# Altium PCB Test_Jig_Project1.PcbDoc
Units mil, origin at the board's own origin, x right, y up, seen from the top; angles counter-clockwise.
Board outline 3937 x 3737 mil, 2 copper layers (Top Layer, Bottom Layer); 46 components, 70 nets, 266 pads, 34 vias.
Unrouted connection lines stored in the file: 33.
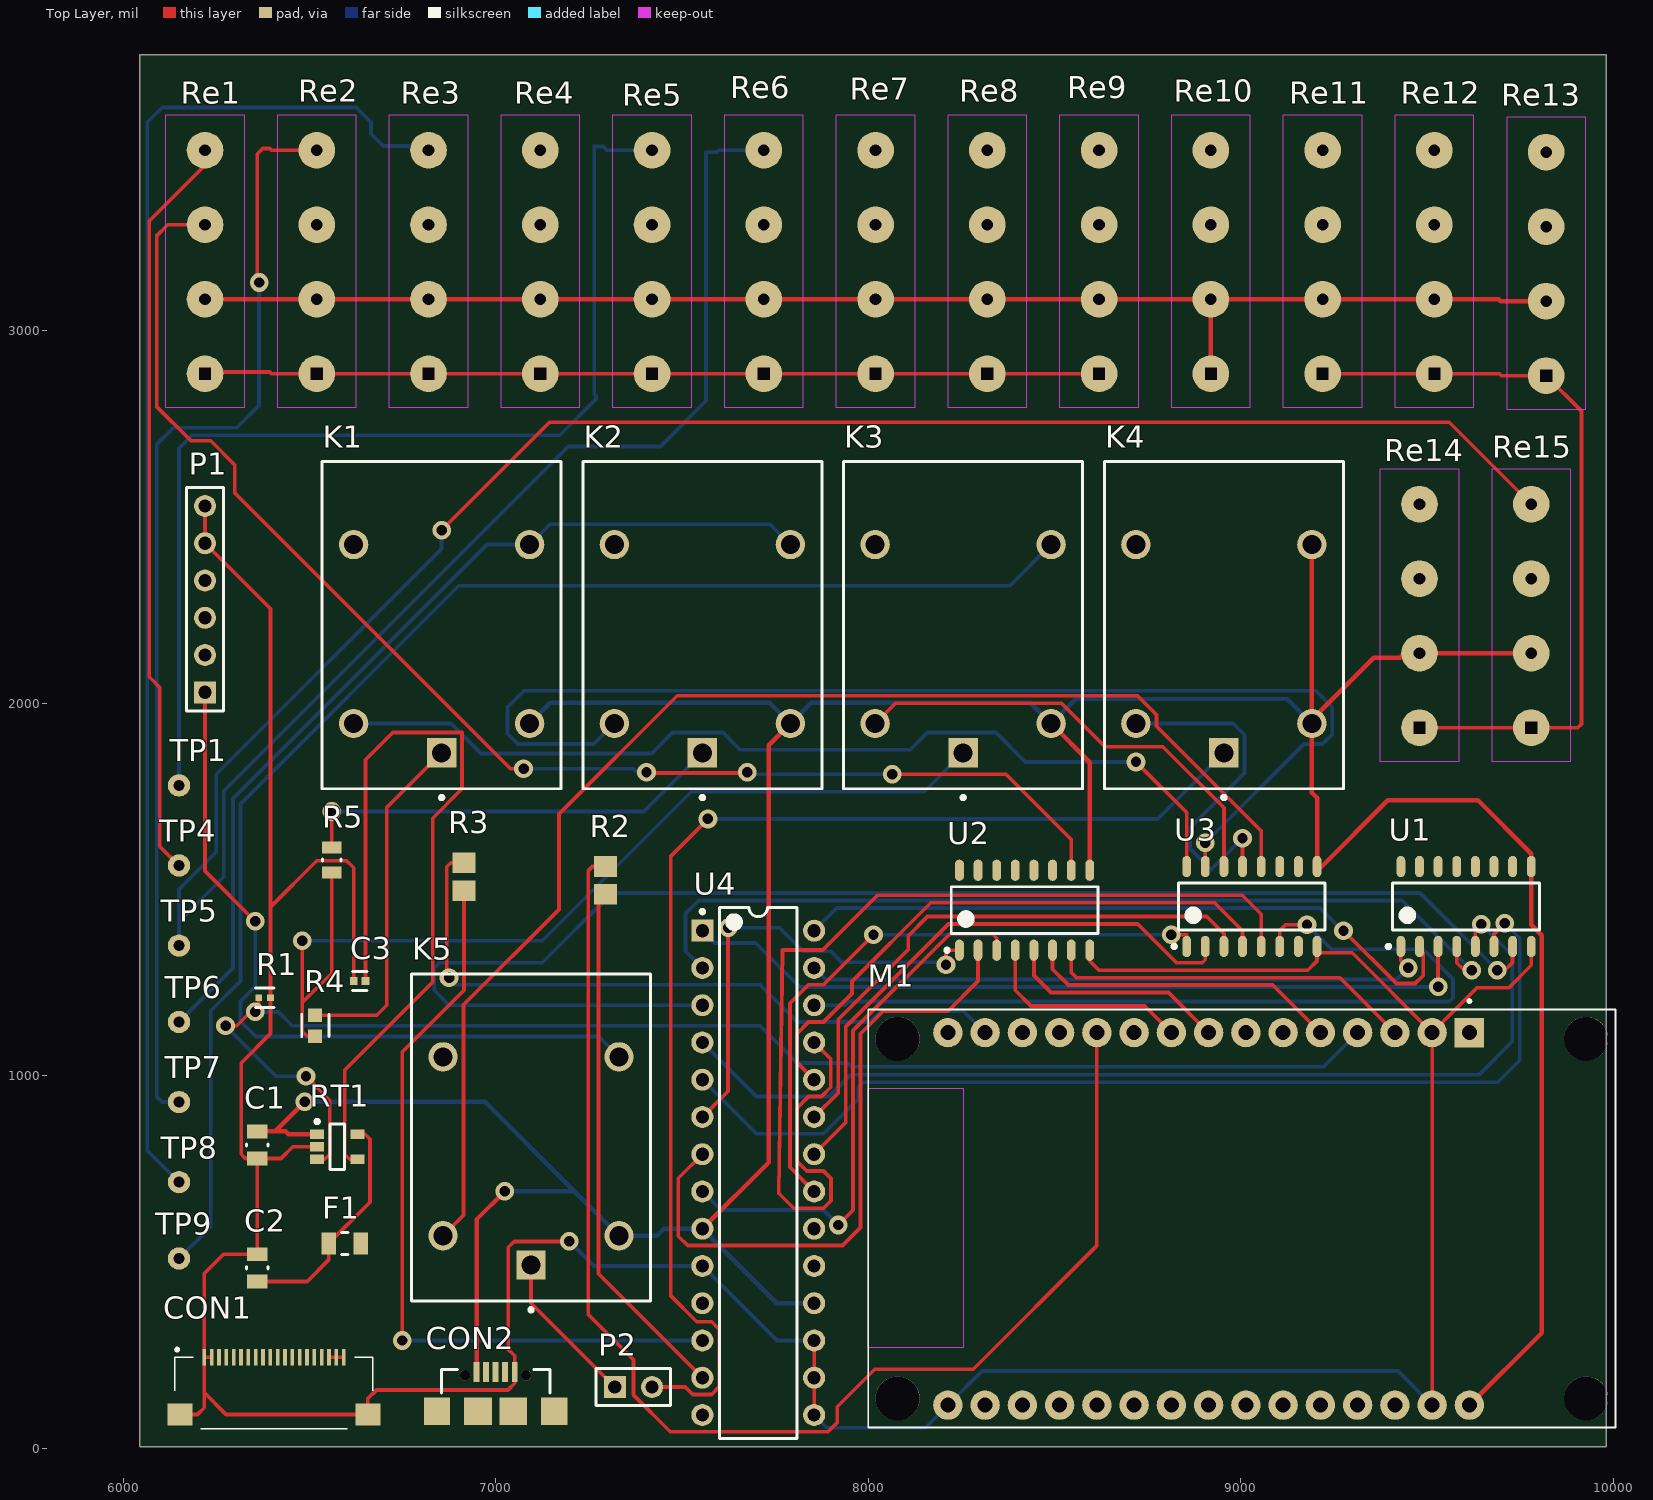
[diagram p0: Top Layer view]
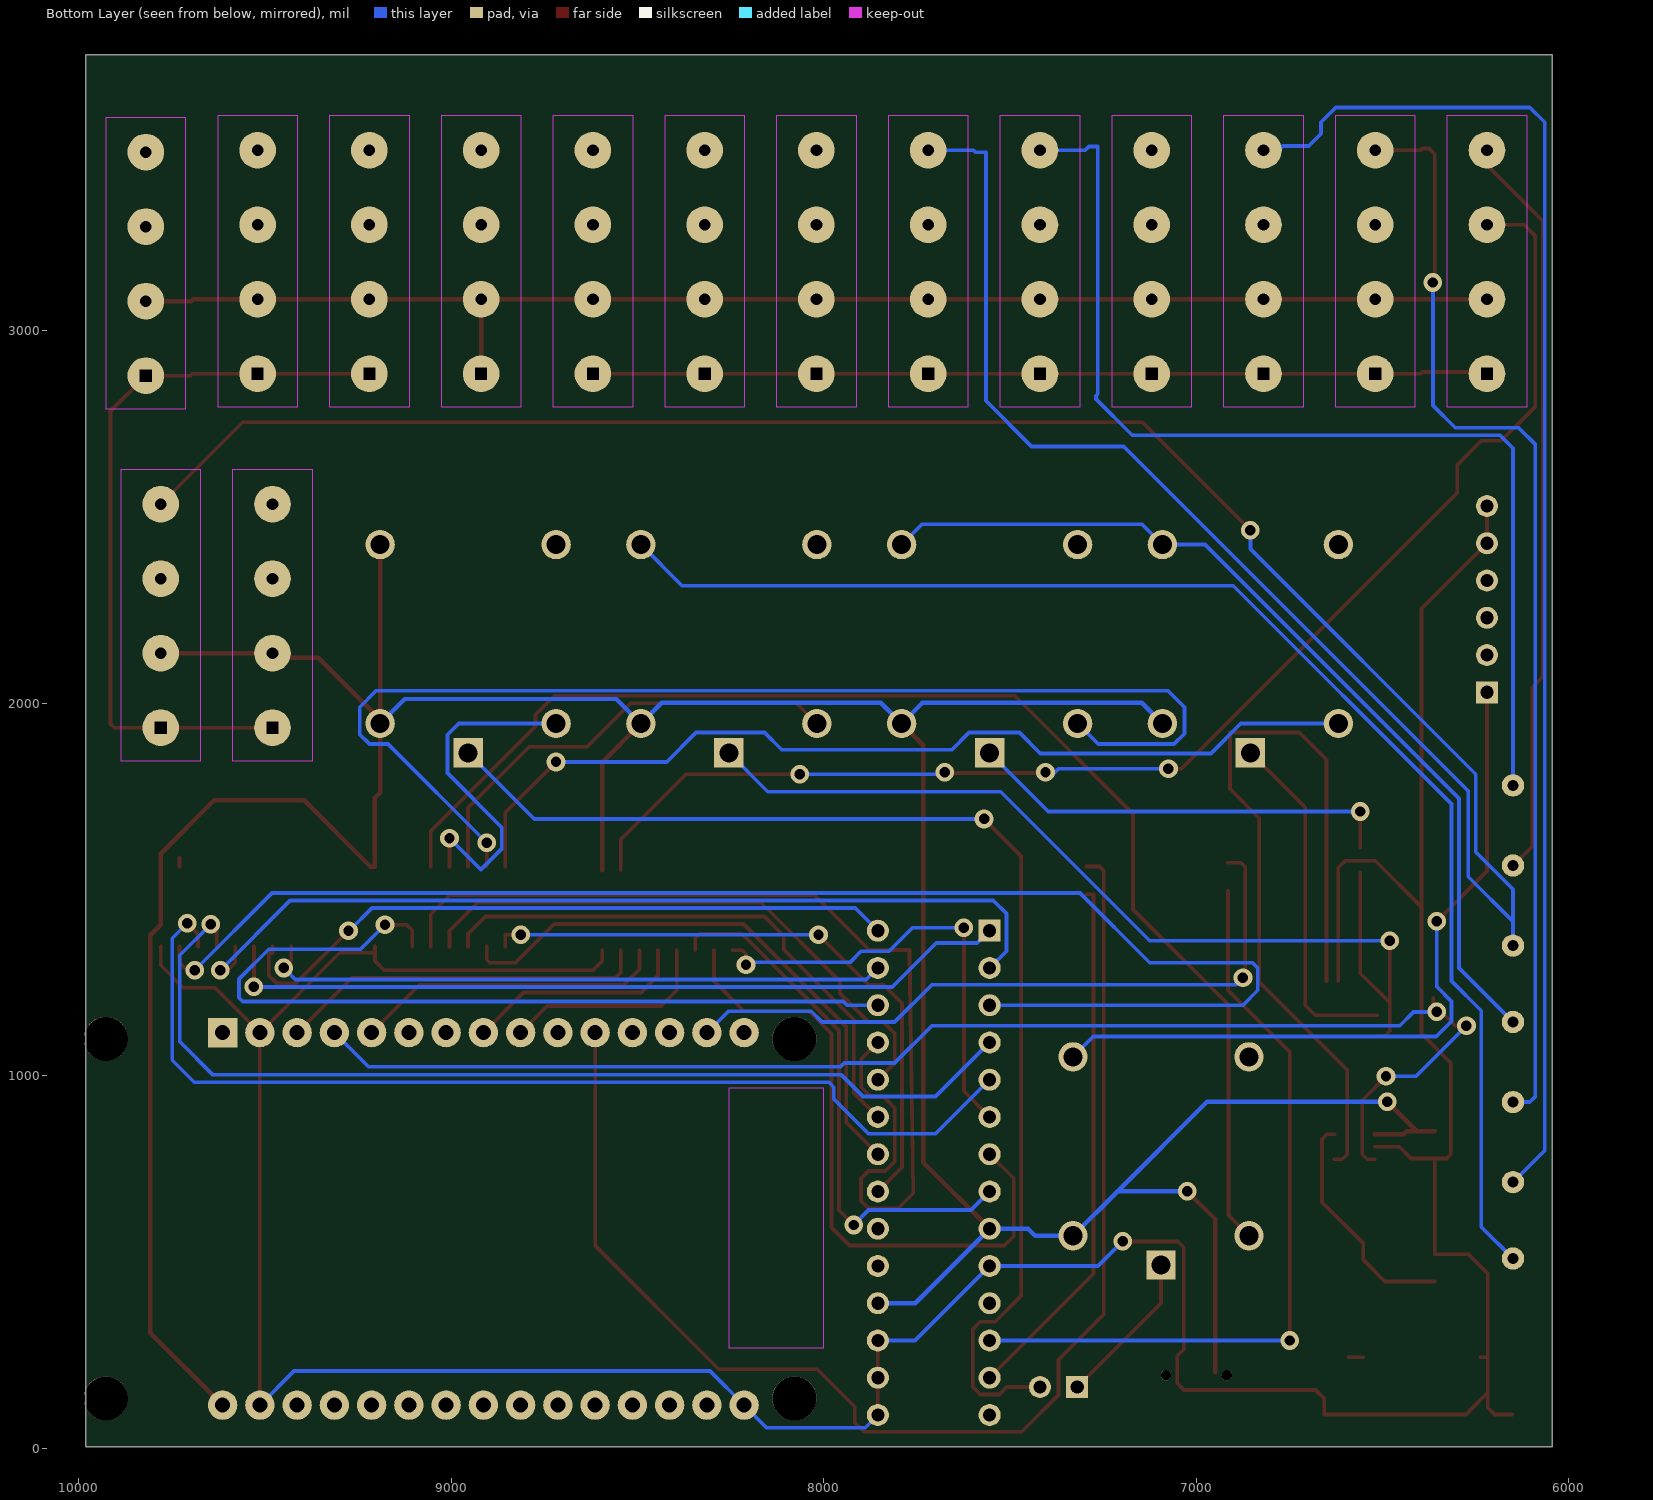
[diagram p1: Bottom Layer view, seen from below]

## Layer stack, top to bottom
Top Solder: solder mask 0.4, Solder Resist, Dk 3.5
Top Layer: signal copper 1.4
Dielectric 1: dielectric 12.6, FR-4, Dk 4.8
Bottom Layer: signal copper 1.4
Bottom Solder: solder mask 0.4, Solder Resist, Dk 3.5

## Board outline
6045,5 9982,5 9982,3742 6045,3742

## Design rules (kind name [scope] priority, off if disabled: settings)
Clearance [All] p1: gap=10 ignorepadtopadclearanceinfootprint=FALSE except(0: Arc-Hole Track-Hole SMDPad-Hole THPad-Hole Via-Hole Fill-Hole Poly-Hole Region-Hole Text-Hole)
PolygonConnect [All] p1: connectstyle=Relief reliefconductorwidth=10 reliefentries=4 polygonreliefangle="90 Angle" airgapwidth=10
RoutingVias [All] p1: holewidth=28 width=50 viastyle="Through Hole" minholewidth=28 minwidth=50 maxholewidth=28 maxwidth=50
SolderMaskExpansion [All] p1: expansion=4
Width "Schematic Width Constraint_1" [InNet('USB_5V_IN')] p1: maxlimit=12 minlimit=6 preferedwidth=12 minimp=50.000000 maximp=50.000000 favimp=50.000000
Width [All] p2: maxlimit=10 minlimit=10 preferedwidth=10
30 further rules are at their usual default settings.

## Components (designator, comment, footprint, x,y, rotation, side; value= is the part's Value field where it differs from the comment)
C1 "1uF" FP-CC0805-0_85-MFG 6360,815 r270 top value="1 uF"
C2 "1uF" FP-CC0805-0_85-MFG 6360,485 r90 top value="1 uF"
C3 "22pF" FP-C0402-BB-MFG 6635,1255 r180 top value="22 pF"
CON1 "XF2M-2015-1A" XF2M20151A 6405,175 r0 top
CON2 "629105136821" 629105136821 7000,100 r0 top
F1 "100mA" FP-MF-PSMF-MFG 6595,550 r0 top value=1-7.5O
K1 "JS1-5V-F" FP-JS1-5V-F-MFG 6855,2210 r90 top
K2 "JS1-5V-F" FP-JS1-5V-F-MFG 7555,2210 r90 top
K3 "JS1-5V-F" FP-JS1-5V-F-MFG 8255,2210 r90 top
K4 "JS1-5V-F" FP-JS1-5V-F-MFG 8955,2210 r90 top
K5 "JS1-5V-F" FP-JS1-5V-F-MFG 7095,835 r90 top
M1 "ESP32-WROOM-32" ESP32-DEVKIT-V1 9010,640 r270 top
P1 "Header 6" HDR1X6 6220,2030 r90 top
P2 "Header 2" HDR1X2 7320,165 r0 top
R1 "100kΩ" FP-CRCW0402-e3-IPC_C 6380,1210 r0 top
R2 "100Ω" RESC2013X60X40ML20T25 7295,1525 r90 top
R3 "100Ω" RESC2013X60X40ML20T25 6915,1535 r270 top
R4 "14Ω" FP-CRCW0603-e3-IPC_B 6515,1135 r90 top
R5 "12Ω" FP-CRCW0805-e3-IPC_C 6560,1580 r90 top
Re1 "PAN CHANG SIP-1A05" "PAN CHANG SIP-1A05" 6220,2885 r90 top
Re2 "PAN CHANG SIP-1A05" "PAN CHANG SIP-1A05" 6520,2885 r90 top
Re3 "PAN CHANG SIP-1A05" "PAN CHANG SIP-1A05" 6820,2885 r90 top
Re4 "PAN CHANG SIP-1A05" "PAN CHANG SIP-1A05" 7120,2885 r90 top
Re5 "PAN CHANG SIP-1A05" "PAN CHANG SIP-1A05" 7420,2885 r90 top
Re6 "PAN CHANG SIP-1A05" "PAN CHANG SIP-1A05" 7720,2885 r90 top
Re7 "PAN CHANG SIP-1A05" "PAN CHANG SIP-1A05" 8020,2885 r90 top
Re8 "PAN CHANG SIP-1A05" "PAN CHANG SIP-1A05" 8320,2885 r90 top
Re9 "PAN CHANG SIP-1A05" "PAN CHANG SIP-1A05" 8620,2885 r90 top
Re10 "PAN CHANG SIP-1A05" "PAN CHANG SIP-1A05" 8920,2885 r90 top
Re11 "PAN CHANG SIP-1A05" "PAN CHANG SIP-1A05" 9220,2885 r90 top
Re12 "PAN CHANG SIP-1A05" "PAN CHANG SIP-1A05" 9520,2885 r90 top
Re13 "PAN CHANG SIP-1A05" "PAN CHANG SIP-1A05" 9820,2880 r90 top
Re14 "PAN CHANG SIP-1A05" "PAN CHANG SIP-1A05" 9480,1935 r90 top
Re15 "PAN CHANG SIP-1A05" "PAN CHANG SIP-1A05" 9780,1935 r90 top
RT1 "RT9193" SOT85P279X130-5N 6440,715 r0 top
TP1 "TP" Testpoint#1 6145,1780 r0 top net-tie
TP4 "TP" Testpoint#2 6120,1560 r90 top net-tie
TP5 "TP" Testpoint#3 6125,1345 r90 top net-tie
TP6 "TP" Testpoint#4 6135,1140 r90 top net-tie
TP7 "TP" Testpoint#4 6135,925 r90 top net-tie
TP8 "TP" Testpoint#3 6125,710 r90 top net-tie
TP9 "TP" Testpoint#5 6110,505 r90 top net-tie
U1 "ULN2003" SOP127P600X175-16N 9605,1455 r90 top
U2 "ULN2003" SOP127P600X175-16N 8420,1445 r90 top
U3 "ULN2003" SOP127P600X175-16N 9030,1455 r90 top
U4 "MCP23017-E/SP" SPDIP300-SP28 7705,740 r0 top

## Footprints (in the part's own frame and the unit in brackets; to place one, negate y for a bottom-side part, rotate by r counter-clockwise, add the part's x,y. Pads: shape width x height; smd on the part's side, far side on the other; paste and mask are expansions set on the pad)
629105136821 [mm] "Micro USB 2.0 SMT Type B Horizontal 5 Contacts"
  rect 0.4x1.35 smd: 1(-1.3,2.675) 2(-0.65,2.675) 3(0,2.675) 4(0.65,2.675) 5(1.3,2.675)
  round 0.7 hole 0.7 unplated: MH1(-2.075,2.45) MH2(2.075,2.45)
  rect 1.8x1.9 smd: Shell(-4,0) Shell(4,0)
  rect 1.9x1.9 smd: Shell(-1.2,0) Shell(1.2,0)
  silkscreen extent -3.7,1.25 3.7,2.85, body extent -4,-2.73 4,3.17, height 2.69
ESP32-DEVKIT-V1 [mm]
  rect 2x2 hole 1.02: 1(-12.098,15.341)
  round 2 hole 1.02: 2(-12.098,12.801) 3(-12.098,10.261) 4(-12.098,7.721) 5(-12.098,5.181) 6(-12.098,2.641) 7(-12.098,0.101) 8(-12.098,-2.439) 9(-12.098,-4.979) 10(-12.098,-7.519) 11(-12.098,-10.059) 12(-12.098,-12.599) 13(-12.098,-15.139) 14(-12.098,-17.679) 15(-12.098,-20.219) 16(13.302,-20.219) 17(13.302,-17.679) 18(13.302,-15.139) 19(13.302,-12.599) 20(13.302,-10.059) 21(13.302,-7.519) 22(13.302,-4.979) 23(13.302,-2.439) 24(13.302,0.101) 25(13.302,2.641) 26(13.302,5.181) 27(13.302,7.721) 28(13.302,10.261) 29(13.302,12.801) 30(13.302,15.341)
  round 3 hole 3 unplated: ""(-11.678,23.301) ""(-11.678,-23.649) ""(12.832,23.301) ""(12.832,-23.649)
  Keep-Out Layer region: 9.382,-25.649 -8.308,-25.649 -8.308,-19.159 9.382,-19.159
  Keep-Out Layer region: 9.382,-25.649 -8.308,-25.649 -8.308,-19.159 9.382,-19.159
  Keep-Out Layer region: 9.382,-25.649 -8.308,-25.649 -8.308,-19.159 9.382,-19.159
  silkscreen extent -14.35,-25.65 14.83,25.3, body extent -13.5,-25.63 15,25.3, height 7.2
FP-C0402-BB-MFG [mm]
  rect 0.52x0.52 smd paste+0 mask+0: 1(-0.4,0) 2(0.4,0)
  silkscreen extent -0.5,-0.64 0.5,0.64, body extent -0.8,-0.4 0.8,0.4, height 0.25
FP-CC0805-0_85-MFG [mm]
  rect 0.95x1.4 smd paste+0 mask+0: 1(-0.925,0) 2(0.925,0)
  silkscreen extent -0.07,-0.73 0.07,0.73, body extent -1.6,-1.05 1.6,1.05, height 0.25
FP-CRCW0402-e3-IPC_C [mil]
  rect 18.43x18.6 smd paste+0 mask+0: 1(-15.83,0) 2(15.83,0)
  silkscreen extent -25,-27 25,27, body extent -29,-15 29,15, height 10
FP-CRCW0603-e3-IPC_B [mil]
  rect 36.81x37.88 smd paste+0 mask+0: 1(-28.17,0) 2(28.17,0)
  silkscreen extent -30,-37 30,35, body extent -56,-29 56,29, height 10
FP-CRCW0805-e3-IPC_C [mil]
  rect 31.75x51.5 smd paste+0 mask+0: 1(-33.5,0) 2(33.5,0)
  silkscreen extent -3,-25 3,25, body extent -53,-31 53,31, height 10
FP-JS1-5V-F-MFG [mm]
  rect 2x2 hole 1.3 paste-1000 mask+0: 1(-8.7,0)
  round 2 hole 1.3 paste-1000 mask+0: 2(-6.7,-6) 3(5.5,-6) 4(5.5,6) 5(-6.7,6)
  silkscreen extent -11.87,-8.15 11.15,8.15, body extent -11.25,-8.25 11.25,8.25, height 0.25
FP-MF-PSMF-MFG [mm]
  rect 1x1.5 smd paste+0 mask+0: 1(-1.1,0) 2(1.1,0)
  silkscreen extent -0.22,-0.75 0.22,0.75, body extent -1.7,-0.85 1.7,0.85, height 0.25
HDR1X2 [mm] "Connector; Header; 2 Position"
  rect 1.5x1.5 hole 0.9: 1(0,0)
  round 1.5 hole 0.9: 2(2.54,0)
  silkscreen extent -1.27,-1.27 3.81,1.27
HDR1X6 [mm] "Connector; Header; 6 Position"
  rect 1.5x1.5 hole 0.9: 1(0,0)
  round 1.5 hole 0.9: 2(2.54,0) 3(5.08,0) 4(7.62,0) 5(10.16,0) 6(12.7,0)
  silkscreen extent -1.27,-1.27 13.97,1.27
"PAN CHANG SIP-1A05" [mm]
  round 2.5 hole 0.8 square: 1(0,0)
  round 2.5 hole 0.8: 2(5.08,0) 3(10.16,0) 4(15.24,0)
  Top Layer pour cut-out: 6.477,8.763
  Keep-Out Layer region: -2.286,-2.698 17.614,-2.698 17.614,2.702 -2.286,2.702
  body extent -2.33,-2.7 17.57,2.7, height 7.95
RESC2013X60X40ML20T25 [mm] "Chip Resistor, 2-Leads, Body 2.00x1.25mm, IPC Low Density"
  rect 1.4x1.55 smd: 1(-0.95,0) 2(0.95,0)
  body extent -1.1,-0.72 1.1,0.72, height 0.6
SOP127P600X175-16N [mm] "SOP, 16-Leads, Body 9.90x3.90mm, Pitch 1.27mm, IPC Medium Density"
  oval 1.45x0.6 smd: 1(-2.725,4.445) 2(-2.725,3.175) 3(-2.725,1.905) 4(-2.725,0.635) 5(-2.725,-0.635) 6(-2.725,-1.905) 7(-2.725,-3.175) 8(-2.725,-4.445) 9(2.725,-4.445) 10(2.725,-3.175) 11(2.725,-1.905) 12(2.725,-0.635) 13(2.725,0.635) 14(2.725,1.905) 15(2.725,3.175) 16(2.725,4.445)
  silkscreen extent -2.85,-5 1.6,5.42, body extent -3,-5 3,5, height 1.75
SOT85P279X130-5N [mm] "SOT23, 5-Leads, Body 2.90x2.79mm, Pitch 0.85mm, IPC Medium Density"
  rect 0.95x0.65 smd: 1(2.054,3.263) 2(2.054,2.413) 3(2.054,1.563) 4(4.804,1.563) 5(4.804,3.263)
  silkscreen extent 1.93,0.86 3.93,4.26, body extent 1.93,0.86 4.93,3.96, height 1.3
SPDIP300-SP28 [mm] "DIP, 28-Pin, Row Spacing 7.62 mm, Pitch 2.54 mm"
  rect 1.5x1.5 hole 0.9: 1(-3.81,16.51)
  round 1.5 hole 0.9: 2(-3.81,13.97) 3(-3.81,11.43) 4(-3.81,8.89) 5(-3.81,6.35) 6(-3.81,3.81) 7(-3.81,1.27) 8(-3.81,-1.27) 9(-3.81,-3.81) 10(-3.81,-6.35) 11(-3.81,-8.89) 12(-3.81,-11.43) 13(-3.81,-13.97) 14(-3.81,-16.51) 15(3.81,-16.51) 16(3.81,-13.97) 17(3.81,-11.43) 18(3.81,-8.89) 19(3.81,-6.35) 20(3.81,-3.81) 21(3.81,-1.27) 22(3.81,1.27) 23(3.81,3.81) 24(3.81,6.35) 25(3.81,8.89) 26(3.81,11.43) 27(3.81,13.97) 28(3.81,16.51)
  silkscreen extent -3.93,-18.1 2.65,18.1, body extent -3.55,-18.1 3.55,18.1, height 5.33
Testpoint#1 [mil]
  round 60 hole 30: 1(5,0)
Testpoint#2 [mil]
  round 60 hole 30: 1(5,-30)
Testpoint#3 [mil]
  round 60 hole 30: 1(5,-25)
Testpoint#4 [mil]
  round 60 hole 30: 1(5,-15)
Testpoint#5 [mil]
  round 60 hole 30: 1(5,-40)
XF2M20151A [mm]
  rect 0.25x1.1 smd: 1(-4.75,1.78) 2(-4.25,1.78) 3(-3.75,1.78) 4(-3.25,1.78) 5(-2.75,1.78) 6(-2.25,1.78) 7(-1.75,1.78) 8(-1.25,1.78) 9(-0.75,1.78) 10(-0.25,1.78) 11(0.25,1.78) 12(0.75,1.78) 13(1.25,1.78) 14(1.75,1.78) 15(2.25,1.78) 16(2.75,1.78) 17(3.25,1.78) 18(3.75,1.78) 19(4.25,1.78) 20(4.75,1.78)
  rect 1.7x1.5 smd: MP1(-6.4,-2.12) MP2(6.4,-2.12)
  silkscreen extent -6.75,-3.1 6.75,2.4

## Part data
C1 C2: library part CMP-03422-000182-1, "CAP CER 1UF 10V X7R 0805", Capacitance="1 uF", Manufacturer=Yageo, Manufacturer Part Number=CC0805KKX7R6BB105, Package=CC0805-0.85, Temperature="-30°C to +85°C", Temperature Characteristic=X7R, Temperature Range High=+85°C, Temperature Range Low=-30°C, Tolerance=0.1, Voltage Rating="10 V", Automotive=No, Category=Cap, ComponentLink2Description=Datasheet, ComponentLink2URL=http://www.yageo.com/documents/recent/UPY-GPHC_Y5V_6.3V-to-50V_8.pdf, Device Class L1="Passive Components", Device Class L2=Capacitors, Device Class L3="Ceramic Capacitors", Digikey Description="CAP CER 1UF 10V X7R 0805", Footprint Url=http://www.yageo.com/exep/pages/download/literatures/UPY-C_GEN_24.pdf, Height=0.95mm, Ipc Land Pattern Name=CAPC200125X85, Lead Free=Yes, Material=Ceramic, Mouser Description="Multilayer Ceramic Capacitors MLCC - SMD/SMT 1.0uF 10V X7R 10%", Octopart=https://octopart.com/cc0805kkx7r6bb105-yageo-42522859, RoHS=TRUE
C3: library part CMP-1034-00897-3, "CAP CER 22PF 10V NP0 0402", Capacitance="22 pF", Manufacturer=Kemet, Manufacturer Part Number=C0402C220K8GACTU, Package=C0402-BB, Temperature="-55°C to +125°C", Temperature Characteristic=C0G, Temperature Coefficient=15%, Temperature Range High=+125°C, Temperature Range Low=-55°C, Tolerance=0.1, Voltage Rating="10 V", Automotive=No, Category=Cap, ComponentLink2Description=Datasheet, ComponentLink2URL=https://content.kemet.com/datasheets/KEM_C1002_X7R_SMD.pdf, Device Class L1="Passive Components", Device Class L2=Capacitors, Device Class L3="Ceramic Capacitors", Digikey Description="CAP CER 22PF 10V NP0 0402", Height=0.55mm, Ipc Land Pattern Name=CAPC10050X50, Lead Free=Yes, Material=Ceramic, Mouser Description="Multilayer Ceramic Capacitors MLCC - SMD/SMT 10volts 22pF C0G 10%", Octopart=https://octopart.com/c0402c220k8gactu-kemet-12592189, RoHS=TRUE
CON1: "OMRON - XF2M-2015-1A - FFC / FPC Board Connector, 0.5 mm, 20 Contacts, Receptacle, XF Series, Surface Mount, Top, Bottom", Manufacturer_Name="Omron Electronics", Mouser Part Number=653-XF2M-2015-1A, Datasheet Link=https://datasheet.lcsc.com/lcsc/1912111437_Omron-Electronics-XF2M-2015-1A_C57541.pdf, Geometry.Height=3.2mm, Manufacturer_Part_Number=XF2M-2015-1A, Mouser Price/Stock=https://www.mouser.co.uk/ProductDetail/Omron-Electronics/XF2M-2015-1A?qs=9iNEzSI19qWZ677VhkompQ%3D%3D, Unit Price="US$ 0.4815"
CON2: library part CMP-1502-03253-1, "Micro USB 2.0 Type B Receptacle WR-COM, Horizontal, SMT, with Pads and Pegs", Contact Resistance=30mOhm, Manufacturer="Wurth Elektronik", Operating temperature=-40to105degC, Rated Current=1A, Working Voltage=30VAC, Connector Type=MicroUSB2.0TypeB, Datasheet URL=https://katalog.we-online.de/em/datasheet/629105136821.pdf, Gender=Receptacle, Manufacturer URL=http://www.we-online.de, Mounting Technology=SMT, Orientation=Horizontal, Package Reference=629105136821, Packaging=TapeandReel, Part Number=629105136821, Publisher=WurthElektronik
F1: library part CMP-07400-000017-1, "PTC RESET FUSE 15V 100MA 0805", Ambient Temperature Range High=+85°C, Ambient Temperature Range Low=-40°C, Current Rating=40A, Hold Current=0.1A, Manufacturer="Bourns Inc.", Manufacturer Part Number=MF-PSMF010X-2, Package=MF-PSMF, Resistance=1-7.5O, Temperature="-40°C to +85°C", Trip Current=0.3A, Voltage Rating=15V, Automotive=No, Category=Fuse, ComponentLink2Description=Datasheet, ComponentLink2URL=https://www.bourns.com/docs/Product-Datasheets/mfpsmf.pdf, Device Class L1="Circuit Protection", Device Class L2="PTC Resettable Fuses", Device Class L3=unset, Digikey Description="PTC RESET FUSE 15V 100MA 0805", Height=0.85mm, Ipc Land Pattern Name=CAPC215135X67, Lead Free=Yes, Mouser Description="Resettable Fuses - PPTC 0.10A 15V 1ohm", Octopart=https://octopart.com/mf-psmf010x-2-bourns-7483441, RoHS=TRUE, Temperature Range High=+85°C, Temperature Range Low=-40°C, Trip Time=1.5s
K1 K2 K3 K4 K5: library part CMP-05606-000016-1, "RELAY GEN PURPOSE SPDT 10A 5V", Ambient Temperature Range High=+70°C, Ambient Temperature Range Low=-40°C, Coil Current=72mA, Coil Power=360mW, Coil Resistance=69.4O, Coil Voltage=5V, Manufacturer=Panasonic, Switching Current=10A, Switching Power=150W, Temperature="-40°C to +70°C", Automotive=No, Category=Relay, Coil Type=Non-Latching, ComponentLink2Description=Datasheet, ComponentLink2URL=https://www3.panasonic.biz/ac/e_download/control/relay/power/catalog/mech_eng_js.pdf?via=ok, Device Class L1=Electromechanical, Device Class L2=Relays, Device Class L3="Power Relays", Digikey Description="RELAY GEN PURPOSE SPDT 10A 5V", Height=16.8mm, Lead Free=Yes, Manufacturer Part Number=JS1-5V-F, Mouser Description="JS Series 10 A SPDT 5 V Through Hole Sealed Miniature Non-Polarized Power Relay", Number Of Contacts=1, Octopart=https://octopart.com/js1-5v-f-panasonic-39428621, Package=JS1-5V-F, RoHS=TRUE, Standoff Height=0.3mm, Temperature Range High=+70°C, Temperature Range Low=-40°C, Throw Configuration=SPDT
M1: library part ESP32-DEVKIT-V1, "Dual core, Wi-Fi: 2.4 GHz up to 150 Mbits/s,BLE (Bluetooth Low Energy) and legacy Bluetooth, 32 bits, Up to 240 MHz"
P1: "Header, 6-Pin", LatestRevisionDate=17-Jul-2002, LatestRevisionNote="Re-released for DXP Platform.", Publisher="Altium Limited"
P2: "Header, 2-Pin", LatestRevisionDate=17-Jul-2002, LatestRevisionNote="Re-released for DXP Platform.", Publisher="Altium Limited"
R1: library part CMP-2002-08123-3, "RES Thick Film, 100kO, 1%, 0.063W, 100ppm/°C, 0402", Case/Package=0402, Case Code (Metric)=1005, Max Operating Temperature=155°C, Max Power Dissipation=63mW, Min Operating Temperature=-55°C, Package Quantity=10000, Resistance=100kR, Temperature Coefficient=100ppm/°C, Tolerance=1%, Voltage Rating=50V, Case Code (Imperial)=0402, Composition="Thick Film", Contact Plating=Tin, Depth=0.5mm, Features="Automotive AEC-Q200", Height=0.35mm, Lead Free="Lead Free", Length=1mm, Military Standard=Not, Mount="Surface Mount", Number of Pins=2, Number of Terminations=2, Packaging="Tape and Reel", Power Rating=63mW, Radiation Hardening=No, Termination=SMD/SMT, Voltage Rating (DC)=50V, Weight=2.3E-05oz, Width=0.02inch
R2 R3: library part CMP-2001-00580-1, "Res Thin Film 0805 100 Ohm 0.1% 1/8W ±25ppm/°C Molded SMD SMD Punched Carrier T/R", Manufacturer=Panasonic, Part Number=ERA6AEB101V
R4: library part CMP-02407-002335-1, "RES Thick Film, 14O, 1%, 0.1W, 100ppm/°C, 0603", Case/Package=0603, Case Code (Metric)=1608, Max Operating Temperature=155°C, Max Power Dissipation=100mW, Min Operating Temperature=-55°C, Package Quantity=10, Resistance=14R, Temperature Coefficient=100ppm/°C, Tolerance=1%, Voltage Rating=75V, Case Code (Imperial)=0603, Composition="Thick Film", Contact Plating=Tin, Depth=0.85mm, Features="Automotive AEC-Q200", Height=0.02inch, Lead Free="Lead Free", Length=1.55mm, Military Standard=Not, Number of Pins=2, Number of Terminations=2, Packaging="Tape and Reel", Power Rating=100mW, Radiation Hardening=No, Voltage Rating (DC)=75V, Weight=7.1E-05oz, Width=0.033inch
R5: library part CMP-1013-00292-2, "RES Thick Film, 12O, 1%, 0.125W, 100ppm/°C, 0805", Case/Package=0805, Case Code (Metric)=2012, Max Operating Temperature=155°C, Max Power Dissipation=125mW, Min Operating Temperature=-55°C, Package Quantity=10, Resistance=12R, Temperature Coefficient=100ppm/°C, Tolerance=1%, Voltage Rating=150V, Case Code (Imperial)=0805, Composition="Thick Film", Depth=1.25mm, Features="Automotive AEC-Q200", Height=0.02inch, Lead Free="Lead Free", Length=2mm, Military Standard=Not, Number of Terminations=2, Packaging="Tape and Reel", Power Rating=125mW, Termination=SMD/SMT, Voltage Rating (DC)=150V, Weight=0.000194oz, Width=0.049inch
Re1 Re2 Re3 Re4 Re5 Re6 Re7 Re8 Re9 Re10 Re11 Re12 Re13 Re14 Re15: "SPST - NO 5V DC Nolocking Through Hole Reed Relays ROHS", LCSC Part #=C10496, Mfr. Part #=SIP-1A05
RT1: library part Component_1
U1 U2 U3: library part Component_1, Manufacturer="Changjiang Electronics Tech", Package=SOP-16, Datasheet=https://datasheet.lcsc.com/lcsc/2108201930_Changjiang-Electronics-Tech--CJ-ULN2003_C2829422.pdf, Mfr. Part #=ULN2003, Unit Price="$ 0.2329"
U4: library part CMP-0186-00081-2, "16-Bit I/O Expander with Serial Interface, 28-Pin SPDIP, Extended Temperature", ComponentLink1Description="Manufacturer URL", ComponentLink1URL=http://www.microchip.com/, ComponentLink2Description=Datasheet, ComponentLink2URL=http://ww1.microchip.com/downloads/en/DeviceDoc/21952b.pdf, ComponentLink3Description="Package Specification", ComponentLink3URL=http://www.microchip.com/stellent/groups/techpub_sg/documents/packagingspec/en012702.pdf, DatasheetVersion="revB, Feb-2007", PackageDescription="28-Lead Skinny Plastic Dual In-Line (SP) - 300 mil Body [SPDIP]", PackageReference=SPDIP300-SP28, PackageVersion="revBB, Aug-2009", RevisionNote="URLs added."

## Via types
v1: diameter 50, hole 28, Top Layer to Bottom Layer, 34 vias

## Nets (pads, with @x,y where several pads share a name; then routed paths per layer and width w, separated by ;. In a path a pad name is that pad's centre, name@x,y a point inside that pad or via, vN(x,y) a via of type N, cw(c..) or ccw(c..) an arc to the next point about the centre after c; other vN are vias at no path point)
1a: U3.1 U4.21 | length 1704.9
  Top Layer w10: U4.21 7790,755 7790,1195 7840,1245 7880,1245 v1(8014.34,1379.34) ; v1(8814,1379.34) 8855,1379.34 U3.1
  Bottom Layer w10: v1(8014.34,1379.34) v1(8814,1379.34)
2b: U3.2 U4.22 | length 1538.6
  Top Layer w10: U4.22 7939.53,874.53 7939.53,1131.53 8216,1408 8724,1408 8828,1304 8897,1304 8905,1312 U3.2
3c: U3.3 U4.23 | length 1513
  Top Layer w10: U4.23 7919.53,954.53 7919.53,1152 8108,1340.48 8108,1376.6 8159.4,1428 8909,1428 8955,1382 U3.3
4d: U3.4 U4.24 | length 1575.7
  Top Layer w10: U4.24 7810,1035 7810,1115 7840,1145 7880,1145 7956.63,1221.63 7956.63,1253.58 8168.05,1465 8930,1465 9005,1390 U3.4
5e: U3.5 U4.25 | length 2835.6
  Top Layer w10: U4.25 7899.53,1045.47 7899.53,970 7874.53,945 7840,945 7810,915 7810,770 7835,745 7880,745 7900,725 7900,665 7880,645 7800,645 7760,685 7770,1338 7878,1338 8025,1485 9004,1485 9055,1434 U3.5
6f: U3.6 U4.26 | length 2348.3
  Top Layer w10: U3.6 9105,1391 9120,1406 v1(9178,1406)
  Bottom Layer w10: U4.26 7938,1190 7948,1200 9560,1200 9570,1210 9570,1260 9490,1340 9244,1340 v1(9178,1406)
D+: U1.2 U4.28 | length 1841.2
  Top Layer w10: v1(9276,1390) 9418,1248 9468,1248 9490,1270 9490,1330 9480,1330 U1.2
  Bottom Layer w10: U4.28 7916,1451 9213,1451 9274,1390 v1(9276,1390)
D+_out: Re8.3 U1.15
D-: U1.1 U4.27 | length 1686.7
  Top Layer w10: U1.1 9430,1310 v1(9450,1290)
  Bottom Layer w10: U4.27 7886,1259 9419,1259 v1(9450,1290)
D-_out: Re7.3 U1.16
EN: M1.4 R1.1 RT1.3 | length 3760.6
  Top Layer w10: v1(6275,1135) 6305.17,1135 v1@6364.17,1194 ; v1(6355,1172) 6364.17,1181.17 v1@6364.17,1194 ; R1.1 v1@6364.17,1194 ; v1(6491,999) 6555,935 6555,790 6541.54,776.54 RT1.3
  Bottom Layer w10: v1(6275,1135) 6411,999 v1(6491,999) ; v1(6355,1172) 6417.12,1172 6454.12,1135 7710,1135 7810,1035 7945,1035 7955,1025 9222.68,1025 M1.4
ESP_RXD: CON1.12 Re14.4
GND: C1.2 C2.2 C3.2 CON1.1 CON1.2 CON1.3 CON1.7 CON1.9 CON1.MP1 CON1.MP2 CON2.5 M1.2 M1.16 M1.29 P1.5 P1.6 R1.2 RT1.2 U1.8 U2.8 U3.8 U4.10 U4.15 U4.16 U4.17 | length 10215
  Top Layer w10: CON1.MP1 6200,91.54 6217.99,109.53 6217.99,150 ; P1.6 P1.5 6395.83,2254.17 6395.83,1453.83 ; CON1.2 CON1.1 ; RT1.2 6455.42,810 6424,778.58 C1.2 ; C3.2 6619.25,1558.75 6600,1578 6520,1578 6395.83,1453.83 ; v1(7198,556) 7050,556 7034,540 7034,266 7051.18,248.82 CON2.5 7051.18,175.18 7033,157 6680,157 6656.97,133.97 CON1.MP2 6276.46,91.54 6217.99,150 ; U4.15 U4.16 U4.17 ; U2.8 8595,1309 8620,1284 9180,1284 9205,1309 U3.8@9205,1331 ; U3.8 U3.8@9205,1331 ; M1.29 M1.2 ; U1.8 9780,1297 9720,1237 9634.68,1237 M1.2 ; 6217.99,150 CON1.1 ; CON1.1 6217.99,470 6269.41,521.42 C2.2 C1.2 ; C1.2 6328.42,778.58 6317,790 6317,1035 6395.83,1113.83 R1.2 6395.83,1453.83 ; U3.8@9205,1331 9299.28,1331 M1.2
  Bottom Layer w10: v1(7198,556) 7264,490 U4.10 7755,290 U4.17 ; U4.15 7889,56 8153.68,56 M1.16 8305.68,208 9422.28,208 M1.29
In_5V_IN_out: K5.5 U3.12 | length 3541.3
  Top Layer w10: K5.5 6914,626.44 6914,1191 7170,1447 7170,1703 7487.59,2020.59 8723.41,2020.59 8774,1970 8774,1939 9055,1658 U3.12
NetC2_1: C2.1 F1.1 RT1.5 | length 625.5
  Top Layer w10: C2.1 6494.58,448.58 6551.69,505.69 F1.1 6663,661.31 6663,830.46 6650,843.46 RT1.5
NetC3_1: C3.1 RT1.4 | length 2185.5
  Top Layer w10: RT1.4 6608.46,776.54 6595,790 6595,1016 6831,1252 6831,1692 6910,1771 6910,1922 6724,1922 6650.75,1848.75 C3.1
NetM1_11: M1.11 R2.2 | length 3596.1
  Top Layer w10: R2.2 7260,1562.4 7249,1551.4 7249,359 7370,238 7370,144 7469,45 7892,45 7917,70 7917,112 8018,213 8282,213 8613.98,544.98 M1.11
NetM1_14: M1.14 R3.1 | length 1874.6
  Top Layer w10: v1(6875,1264) 6869,1270 6869,1561.4 6880,1572.4 R3.1
  Bottom Layer w10: v1(6875,1264) 6894,1245 7710,1245 7810,1145 8005,1145 8034,1174 8256.28,1174 M1.14
NetRe1_4: Re1.4 TP4.1 | length 2015.3
  Top Layer w10: TP4.1 6098.62,1616.38 6098.62,2043.19 6070,2071.81 6070,3295 6220,3445 Re1.4
NetRe2_4: Re2.4 TP7.1 | length 2970.1
  Top Layer w10: v1@6360,3145 6360,3475 6375,3490 6393.62,3490 6398.62,3485 Re2.4
  Bottom Layer w10: TP7.1 6105,930 6090,945 6090,2695 6135,2740 6305,2740 6365,2800 v1(6365,3130) v1@6360,3135
NetRe3_4: Re3.4 TP8.1 | length 3717.5
  Bottom Layer w10: TP8.1 6065,800 6065,3560 6105,3600 6625.89,3600 6665.52,3560.37 6665.52,3529.48 6698.62,3496.38 6767.77,3496.38 6779.15,3485 Re3.4
NetRe5_4: Re5.4 TP1.1 | length 2918.2
  Bottom Layer w10: TP1.1 6150,2685 6185,2720 7172.43,2720 7269.57,2817.14 7269.57,2825.43 7265,2830 7265,3495 7288.62,3495 7298.62,3485 Re5.4
Ribbon_D+: U1.7 U4.3 | length 3912.2
  Top Layer w10: v1(9689,1284) 9709,1284 9730,1305 U1.7
  Bottom Layer w10: U4.3 6875,1190 6835,1230 6835,1290 6849,1304 7125,1304 7312.26,1491.26 9481.74,1491.26 v1(9689,1284)
Ribbon_D+_out: Re13.3 U1.11
Ribbon_D-: U1.5 U4.4 | length 2710.1
  Top Layer w10: U1.5 9630,1391 v1(9646,1407)
  Bottom Layer w10: U4.4 7700,945 7895,945 7953,1003 9639.69,1003 9729,1092.31 9729,1324 v1(9646,1407)
Ribbon_D-_out: Re12.3 U1.12
Ribbon_RXD: U1.6 U4.5 | length 2812.9
  Top Layer w10: U1.6 9680,1381 v1(9709,1410)
  Bottom Layer w10: U4.5 7700,845 7880,845 7973.56,938.56 7973.56,970 7986.56,983 9689.99,983 9749,1042.01 9749,1370 v1(9709,1410)
Ribbon_RXD_out: Re14.3 U1.10 | length 23.7
  Top Layer w10: U1.10 U1.10@9730,1586
RXD: U1.3 U4.1 | length 2145.7
  Top Layer w10: v1(9530,1240) U1.3
  Bottom Layer w10: U4.1 7588,1357 7698.47,1357 7816.47,1239 9529,1239 v1(9530,1240)
RXD_out: Re9.3 U1.14
SCL: CON1.11 R3.2 U4.12 | length 2082.4
  Top Layer w10: v1(6749,290) 6749,1064 6915,1230 R3.2
  Bottom Layer w10: v1(6749,290) U4.12
SDA: CON1.10 R2.1 U4.13 | length 1432.2
  Top Layer w10: R2.1 7276,1487.6 7276,469 U4.13
TP1: U2.3 U4.8 | length 1470.8
  Top Layer w10: v1(7920,600) 7959.53,639.53 7959.53,1121.81 8219.47,1381.75 8333.25,1381.75 8345,1370 U2.3
  Bottom Layer w10: U4.8 7605,640 7880,640 v1(7920,600)
TP1_out: Re5.3 U2.14
TP4: M1.3 U2.7 | length 995.7
  Top Layer w10: U2.7 8545,1278 8559,1264 9266.28,1264 M1.3
TP4_out: Re1.3 U2.10 | length 3646.8
  Top Layer w10: Re1.3 6120,3285 6090,3255 6090,2797.4 6182.4,2705 6235,2705 6300,2640 6300,2565 7040,1825 v1(7075,1825) ; v1(7405,1815) 7406.89,1813.11 7673.11,1813.11 v1(7675,1815) ; v1(8065,1810) 8370,1810 8545,1635 U2.10
  Bottom Layer w10: v1(7075,1825) 7370,1825 v1@7385,1810 ; v1(7675,1815) 7680,1810 v1(8065,1810)
TP5: U2.2 U4.7 | length 1743
  Top Layer w10: U4.7 7490.47,725.47 7490.47,570 7515.47,545 7931,545 7979.53,593.53 7979.53,1113.53 8040,1174 8214,1174 8295,1255 U2.2
TP5_out: Re6.3 U2.15
TP5_point_out: Re15.3 U3.11
TP5_poit: Re6.4 Re15.4 TP5.1 | length 7496.4
  Top Layer w10: v1(6855,2465) 7145,2755 9560,2755 Re15.4
  Bottom Layer w10: TP5.1 6150,1415 ; v1(6855,2465) 6855,2415 6250,1810 6250,1601.36 6150,1501.36 6150,1415 ; Re6.4 7598.62,3485 7593.62,3480 7565,3480 7565,2812.57 7442.43,2690 7195,2690 6270,1765 6270,1535 6150,1415
TP6: M1.9 U2.4 | length 573.8
  Top Layer w10: U2.4 8395,1230 8437,1188 8742.28,1188 M1.9
TP6_out: Re4.3 U2.13
TP6_poit: K1.3 K2.3 Re4.4 TP6.1 | length 2483.7
  Bottom Layer w10: TP6.1 6295,1290 6295,1745 6976.54,2426.54 K1.3 7145.68,2481 7736.76,2481 K2.3
TP7: M1.5 U2.6 | length 840.6
  Top Layer w10: U2.6 8495,1286.73 8537.73,1244 9086.28,1244 M1.5
TP7_out: Re2.3 U2.11
TP8: M1.8 U2.5 | length 600.4
  Top Layer w10: U2.5 8445,1270 8491,1224 8806.28,1224 M1.8
TP8_out: Re3.3 U2.12
TP9: U1.4 U4.2 | length 2458.8
  Top Layer w10: U1.4 9580,1304 9600,1284 v1(9620,1284)
  Bottom Layer w10: U4.2 7510,1335 7510,1436 7545.26,1471.26 9432.74,1471.26 v1(9620,1284)
TP9_out: Re11.3 U1.13
TP9_poit: K3.3 Re11.4 TP9.1 | length 3753.1
  Bottom Layer w10: TP9.1 6235,595 6235,1175 6315,1255 6315,1730 6901,2316 8380.68,2316 K3.3
TP61: K1.1 R4.2 | length 942.5
  Top Layer w10: R4.2 6681.17,1163.17 6708,1190 6708,1720.48 K1.1
TP61_out: K1.5 U3.16 | length 2564.5
  Top Layer w10: v1(8719,1843) 8855,1707 U3.16
  Bottom Layer w10: K1.5 6880.78,1946.22 6961,1866 7419,1866 7475,1922 7610,1922 7656,1876 8113,1876 8159,1922 8343,1922 8422,1843 v1(8719,1843)
TP62: K2.1 R5.2 | length 1156.7
  Top Layer w10: R5.2 v1(6560,1710)
  Bottom Layer w10: v1(6560,1710) 7397.52,1710 K2.1
TP62_out: K2.5 U3.15 | length 3241
  Top Layer w10: U3.15 v1(8905,1626)
  Bottom Layer w10: K2.5 7263.56,1891 7060,1891 7032,1919 7032,1990 7076,2034 9202,2034 9246,1990 9246,1917 9220,1891 9170,1891 v1(8905,1626)
TP91: K3.1 R4.1 R5.1 | length 2647.6
  Top Layer w10: v1(6481,1363) 6481,1197 ; R4.1 6494.17,1106.83 6481,1120 6481,1197 ; R5.1 6560,1276 6481,1197
  Bottom Layer w10: v1(6481,1363) 7125,1363 7525,1763 8150.52,1763 K3.1
TP91_out: K3.5 U3.14 | length 1232.7
  Top Layer w10: K3.5 8073.15,2000.59 8519.41,2000.59 8636,1884 8791,1884 8955,1720 U3.14
USB1_5V_IN: K5.3 P1.1 Re10.4 | length 2011.2
  Top Layer w10: P1.1 6220,1550 v1(6355,1415)
  Bottom Layer w10: v1(6355,1415) 6355,1240 6315,1200 6315,1147 6356,1106 7276.76,1106 K5.3
USB1_D+: P1.3 Re8.4
USB1_D-: P1.2 Re7.4
USB1_RXD: P1.4 Re9.4
USB_5V_IN: C1.1 CON2.1 K1.2 K2.2 K3.2 K4.2 K4.3 K5.2 M1.30 Re1.2 Re2.2 Re3.2 Re4.2 Re5.2 Re6.2 Re7.2 Re8.2 Re9.2 Re10.1 Re10.2 Re11.2 Re12.2 Re13.2 Re14.2 Re15.2 RT1.1 U1.9 U2.9 U3.9 U4.9 U4.18 | length 14340.7
  Top Layer w12: Re1.2 Re2.2 Re3.2 Re4.2 Re5.2 Re6.2 Re7.2 Re8.2 Re9.2 Re10.2 ; C1.1 6408.42,851.42 ; v1(6488,931) 6408.42,851.42 ; RT1.1 6443.95,843.46 6436,851.42 6408.42,851.42 ; CON2.1 6948.82,614.82 v1(7025,691) ; U4.9 7733,768 7733,1888 K2.2 ; K3.2 8595,1842.44 U2.9 ; Re10.1 Re10.2 ; K4.3 K4.2@9191.22,1956.22 ; M1.30 9808,310.32 9808,1378 9780,1406 U1.9 9780,1597 9637,1740 9395,1740 9217,1562 9205,1562 U3.9 9205,1747 9191.22,1760.78 K4.2 K4.2@9191.22,1956.22 ; Re15.2 Re14.2 9440.08,2135 9427.7,2122.62 9357.62,2122.62 K4.2@9191.22,1956.22 ; Re13.2 9697.62,3080 9692.62,3085 Re12.2 Re11.2 Re10.2
  Bottom Layer w12: v1(6488,931) 6971.44,931 7211.44,691 ; v1(7025,691) 7211.44,691 ; K1.2 7147,2002 7735.44,2002 K2.2 7847,2002 8435.44,2002 K3.2 8557,2012 9125.44,2012 K4.2 ; U4.18 7755,390 U4.9 7451.78,590 7433,571.22 K5.2 7211.44,691
USB_5V_IN_out: K4.5 U3.13 | length 944.2
  Top Layer w10: U3.13 v1(9005,1638)
  Bottom Layer w10: K4.5 8980,1946.22 9010,1916.22 9010,1813 8865,1668 8865,1609 8920,1554 8921,1554 v1(9005,1638)
USB_5V_OUT: CON1.17 CON1.18 CON1.19 CON1.20 | length 39.4
  Top Layer w10: CON1.18 CON1.19 CON1.20
USB_D+: CON1.14 Re13.4
USB_D-: CON1.15 Re12.4
USB_ON: U2.1 U4.6 | length 1230.9
  Top Layer w10: U4.6 7624,959 v1(7624,1398) ; v1(8209,1299) 8209,1326.72 8220,1337.72 U2.1
  Bottom Layer w10: v1(7624,1398) 7762,1398 7825,1335 7900,1335 7930,1305 8189,1305 8195,1299 v1(8209,1299)
USB_ON_out: Re10.3 U2.16
VCC_3.3V: CON1.16 F1.2
Voltmeter+: K5.1 P2.1 Re1.1 Re2.1 Re3.1 Re4.1 Re5.1 Re6.1 Re7.1 Re8.1 Re9.1 | length 2824.8
  Top Layer w10: Re1.1 6225,2890 6393.62,2890 6398.62,2885 Re2.1 Re3.1 Re4.1 Re5.1 Re6.1 Re7.1 Re8.1 Re9.1 ; K5.1 7095,390 P2.1
Voltmeter-: K4.1 P2.2 Re11.1 Re12.1 Re13.1 Re14.1 Re15.1 | length 5310.2
  Top Layer w10: P2.2 7509,165 7529,145 7580,145 7600,165 7600,320 7580,340 7540,340 7470.47,409.53 7470.47,1590.47 v1(7570,1690) ; Re11.1 Re12.1 9695,2885 9700,2880 Re13.1 9915,2785 9915,1945 9905,1935 ; Re14.1 Re15.1 9901.22,1935
  Bottom Layer w10: v1(7570,1690) 8777.52,1690 K4.1
pads on no net: CON1.4 CON1.5 CON1.6 CON1.8 CON1.13 CON2.2 CON2.3 CON2.4 CON2.MH1 CON2.MH2 CON2.Shell K1.4 K2.4 K3.4 K4.4 K5.4 M1. M1.1 M1.6 M1.7 M1.10 M1.12 M1.13 M1.15 M1.17 M1.18 M1.19 M1.20 M1.21 M1.22 M1.23 M1.24 M1.25 M1.26 M1.27 M1.28 U3.7 U3.10 U4.11 U4.14 U4.19 U4.20

## Silkscreen, mask and mechanical layers (free items; w line width, h text height)
Mechanical 1:
  the board outline again, w10

## Text inside footprints (layer, text, board x,y; h text height)
CON2: Mechanical 2 "PCB Edge" at 6952.76,17.32 h16